# Altium PCB board.PcbDoc
Units mm, origin at the board's own origin, x right, y up, seen from the top; angles counter-clockwise.
Board outline 26.5 x 37 mm, 4 copper layers (Top Layer, Mid Layer 1, Mid Layer 2, Bottom Layer), stack 0.97 mm thick; 116 components, 67 nets, 313 pads, 64 vias.
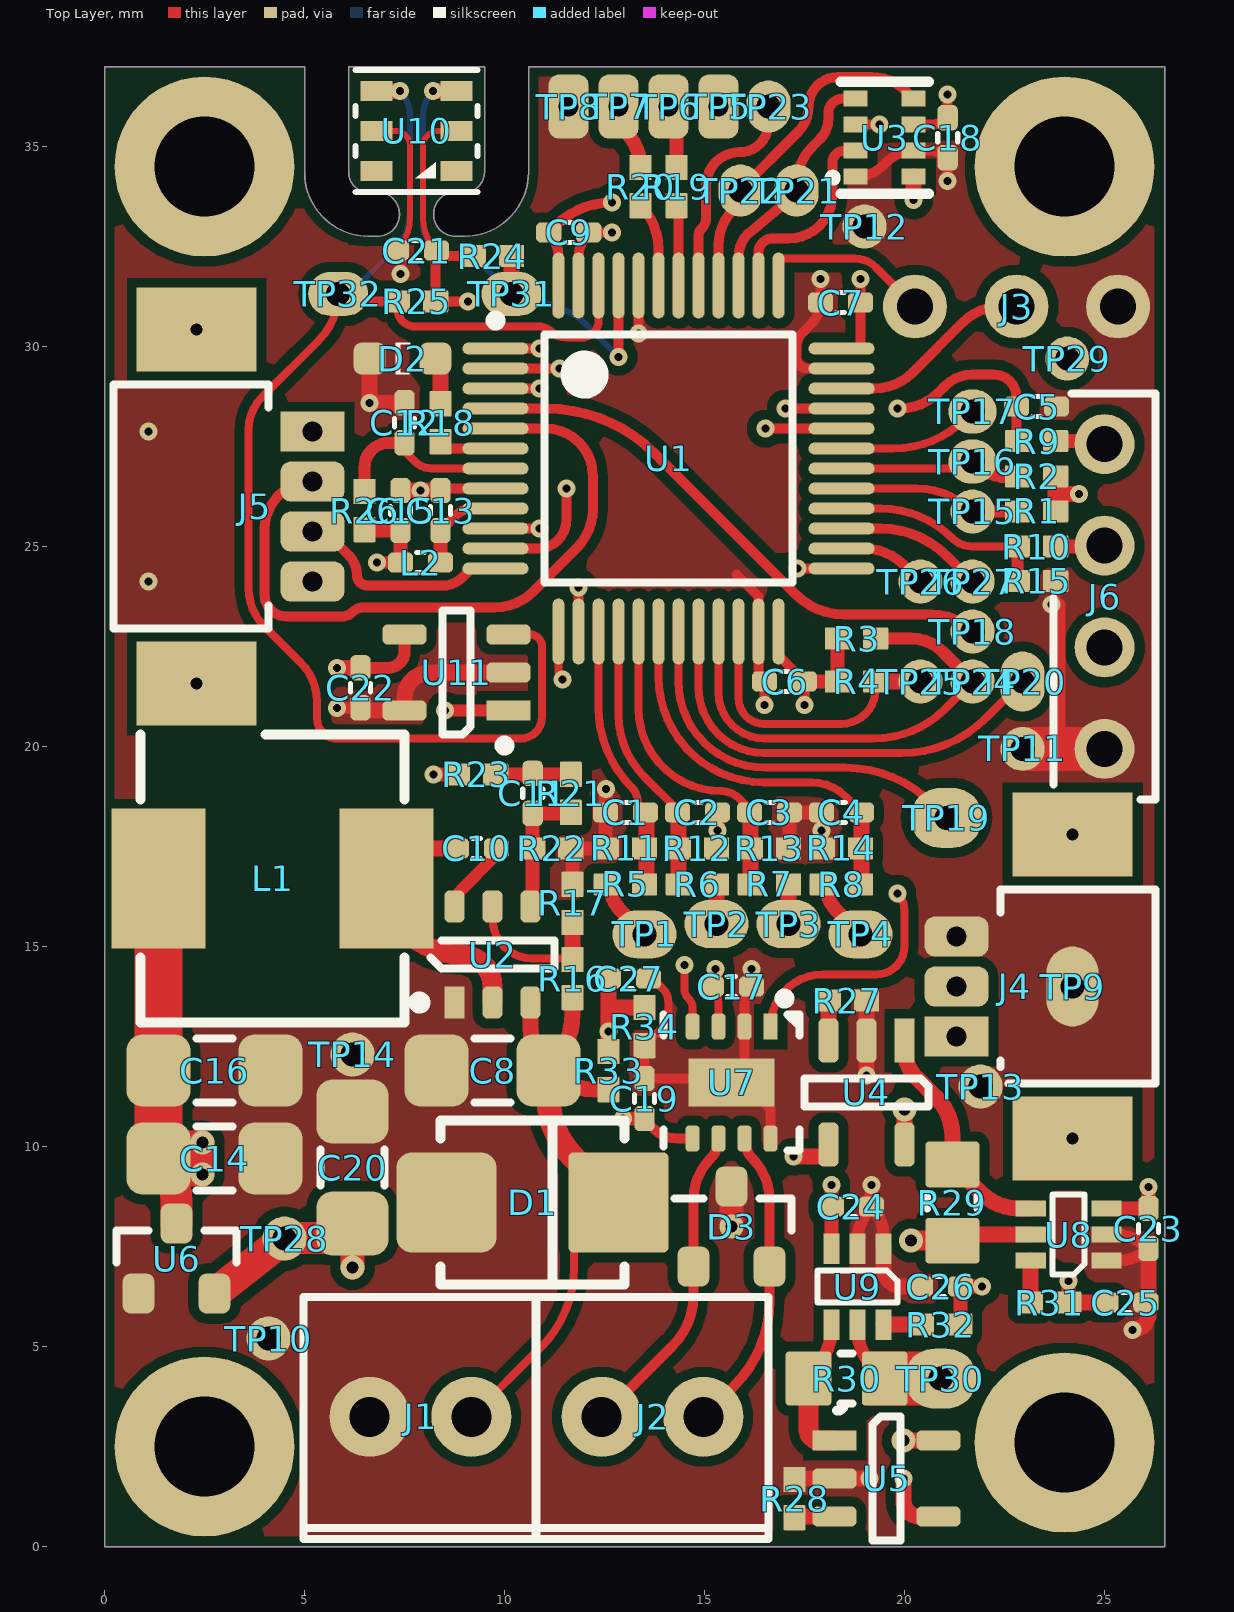
[diagram p0: Top Layer view]
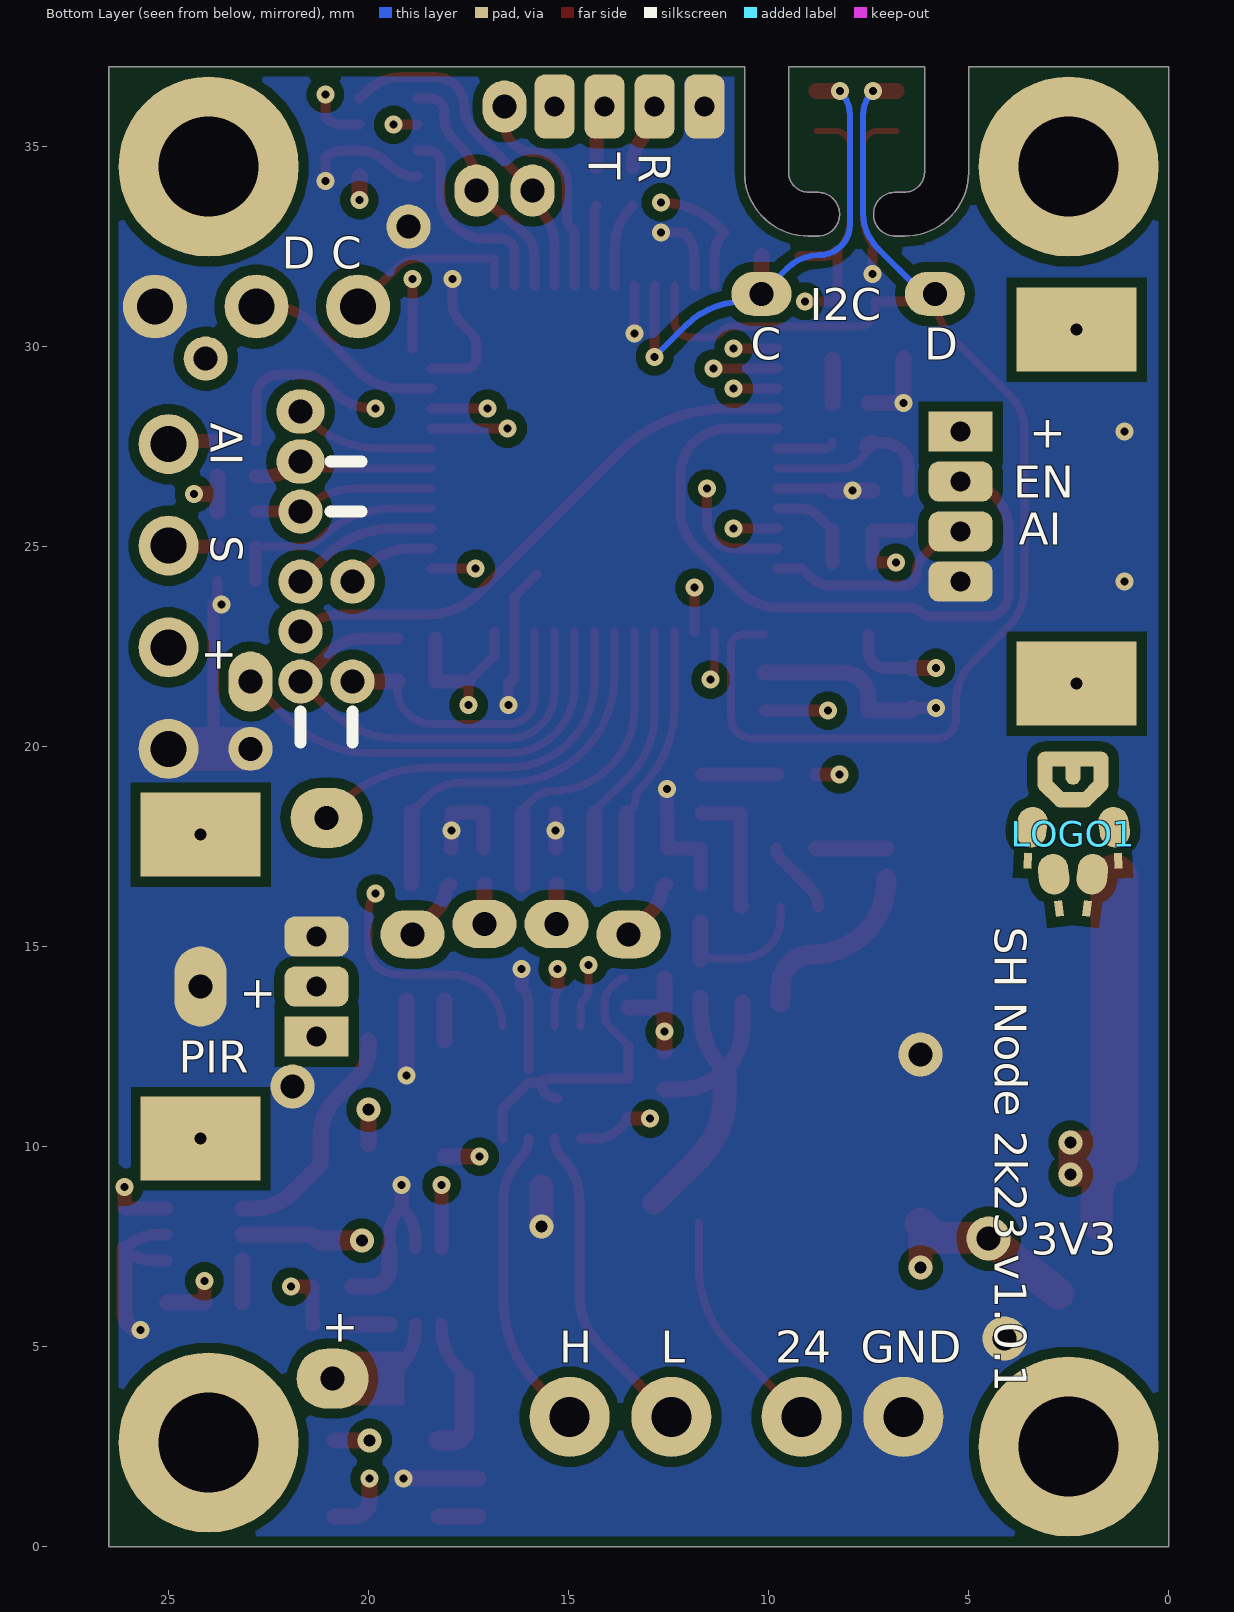
[diagram p1: Bottom Layer view, seen from below]
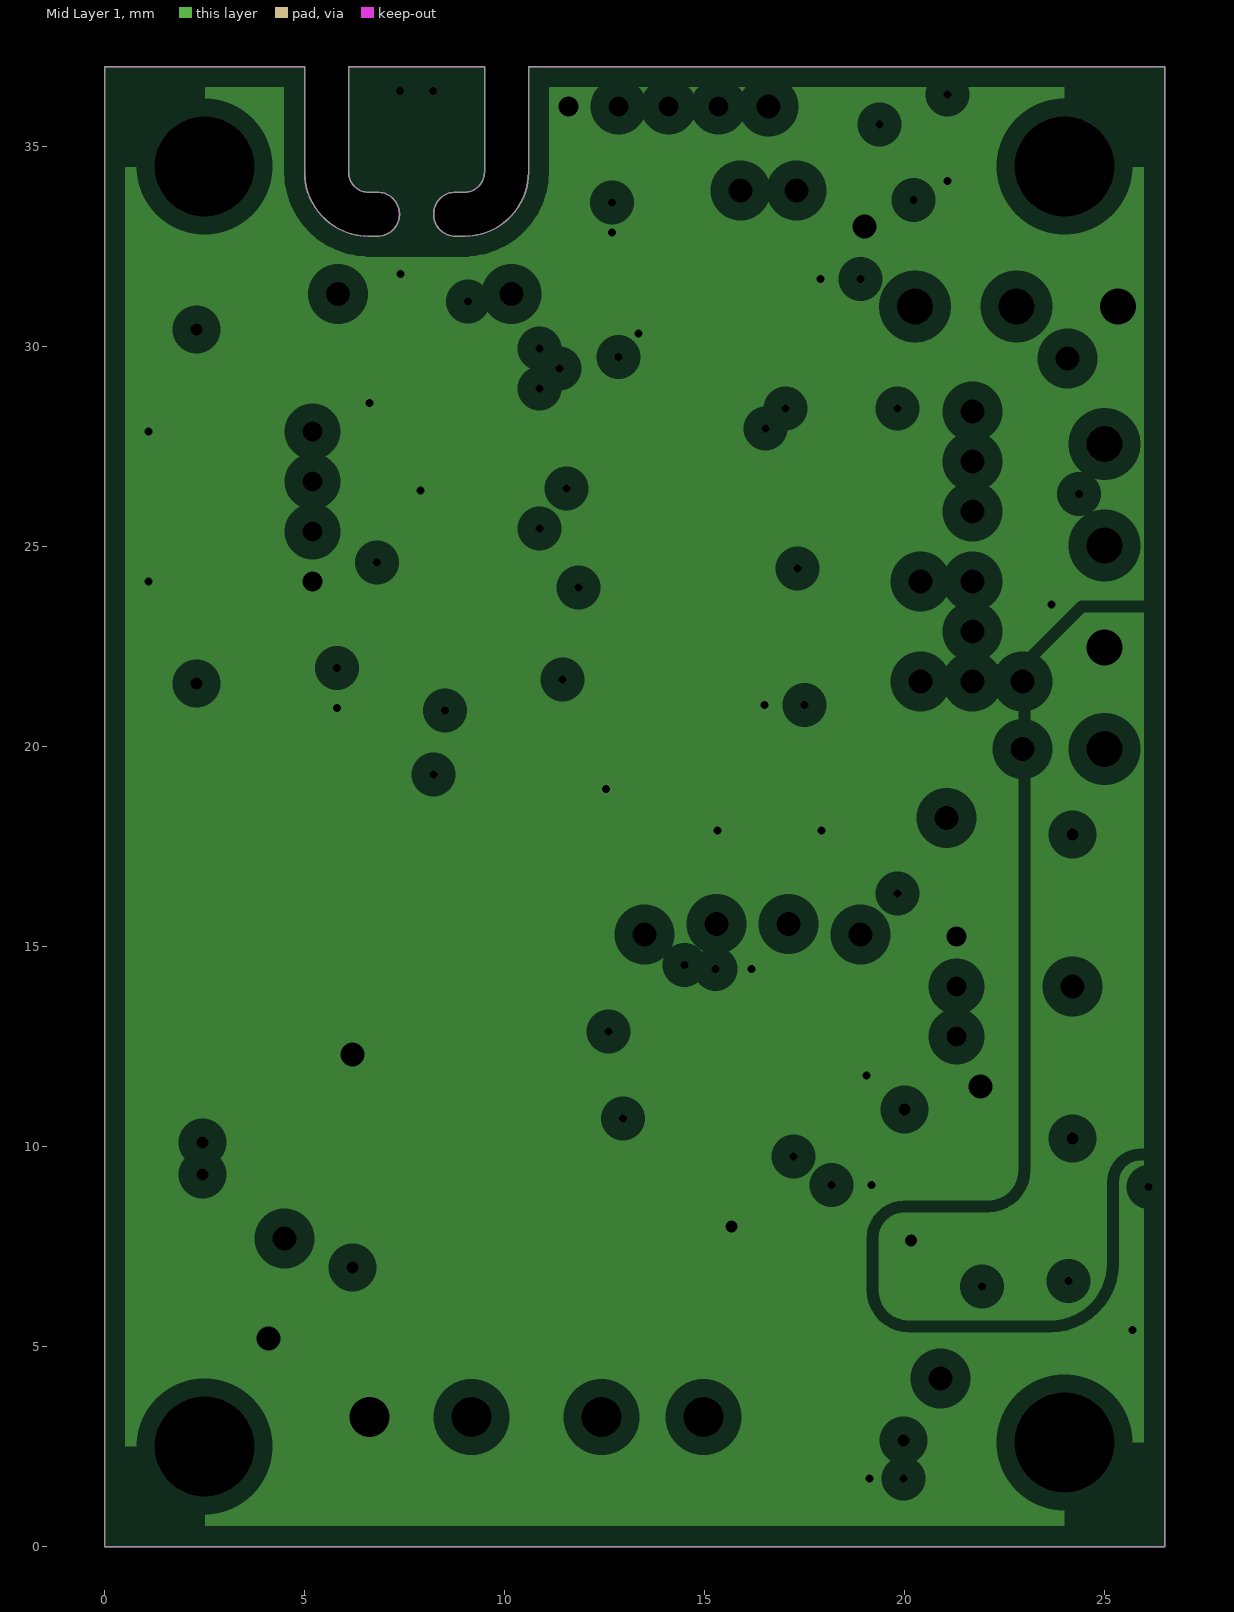
[diagram p2: Mid Layer 1, clearances drawn from the general rule]
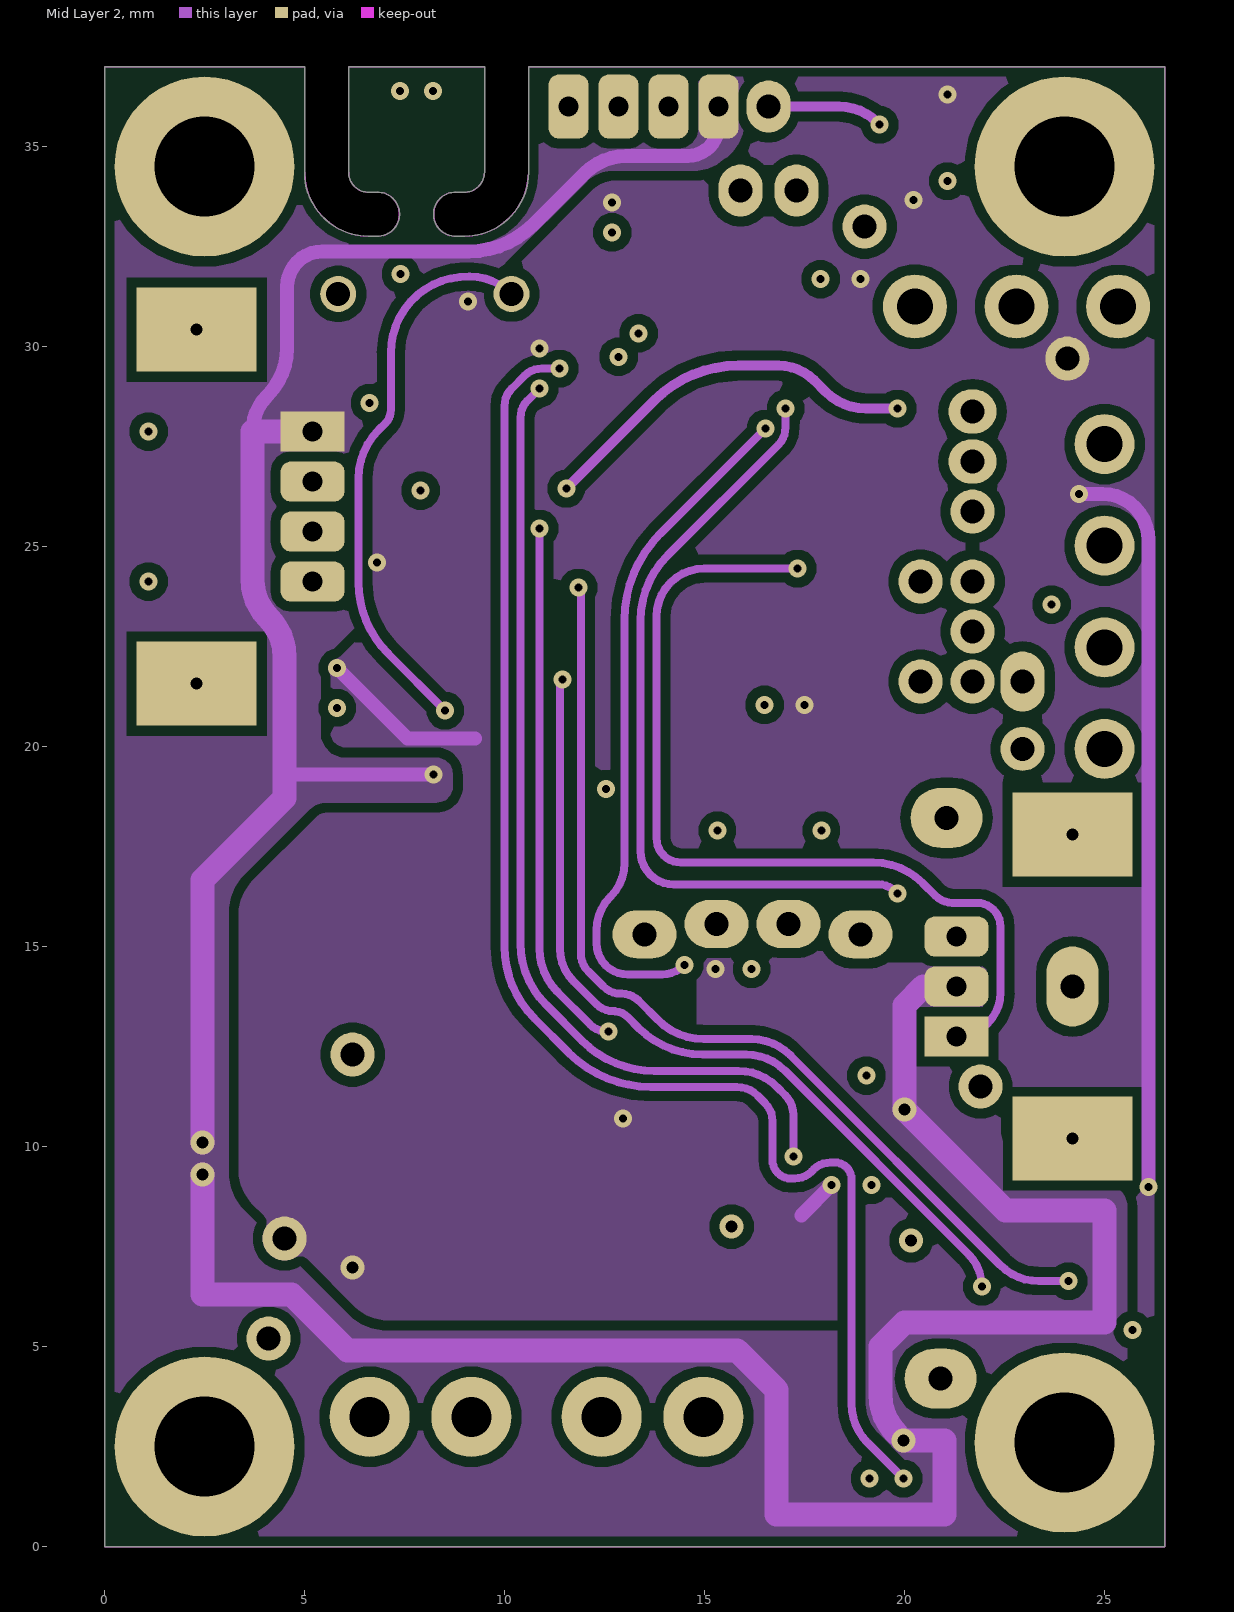
[diagram p3: Mid Layer 2]
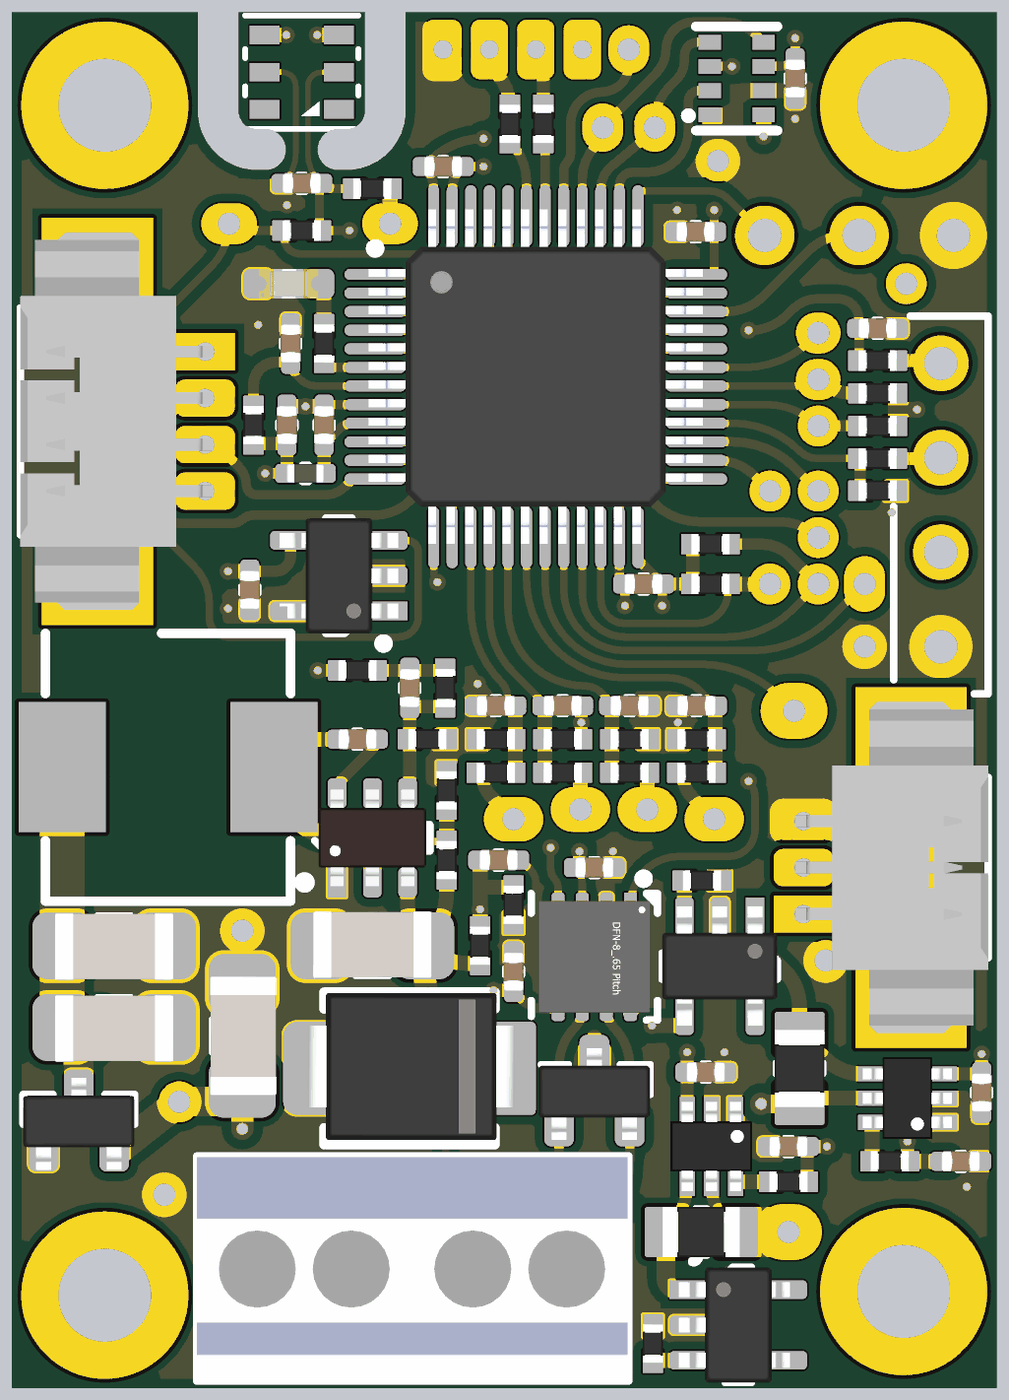
[diagram p4: 3D render of the assembled board from above, using the file's embedded part models]

## Layer stack, top to bottom
Top Solder: solder mask 0.0127, Solder Resist, Dk 3.8
Top Layer: signal copper 0.035
Dielectric 1: prepreg 0.1, 2313, Dk 4.05
Mid Layer 1: plane copper 0.0175, net (Multiple Nets)
Core: core 0.665, FR-4, Dk 4.5
Mid Layer 2: signal copper 0.0175
Dielectric 2: prepreg 0.1, 2313, Dk 4.05
Bottom Layer: signal copper 0.035
Bottom Solder: solder mask 0.0127, Solder Resist, Dk 3.8

## Board outline
5,34.358 ccw(c6.6,34.358) 6.6,32.758 6.825,32.758 ccw(c6.825,33.308) 6.825,33.858 6.6,33.858 cw(c6.6,34.358) 6.1,34.358 6.1,37 9.5,37 9.5,34.358 cw(c9,34.358) 9,33.858 8.775,33.858 ccw(c8.775,33.308) 8.775,32.758 9,32.758 ccw(c9,34.358) 10.6,34.358 10.6,37 26.5,37 26.5,0 0,0 0,37 5,37

## Design rules (kind name [scope] priority, off if disabled: settings)
AcuteAngle [All] p1: minimum=6.00000000000000E+0001 checktracksonly=FALSE
Clearance Clearance_1 [All] p1: gap=0.25 ignorepadtopadclearanceinfootprint=FALSE except(0.13: Arc-Arc Arc-Track Arc-SMDPad Arc-Via Track-Track Track-SMDPad Track-Via SMDPad-SMDPad SMDPad-Via THPad-Via Via-Via; 0.15: Arc-THPad Arc-Text Arc-Hole Track-THPad Track-Text Track-Hole SMDPad-THPad SMDPad-Text SMDPad-Hole THPad-THPad THPad-Text THPad-Hole Via-Text Via-Hole Fill-Text Fill-Hole Poly-Text Poly-Hole Region-Text Region-Hole Text-Text Text-Hole)
ComponentClearance ComponentClearance_1 [HasFootprint('CONN_DG308-2.54-2P') vs HasFootprint('CONN_DG308-2.54-2P')] p1: gap=-1 collisioncheckmode=3 verticalgap=2540 showdistances=FALSE
ComponentClearance ComponentClearance_3 [HasFootprint('HDR-1X4')] p2: gap=-1 collisioncheckmode=3 verticalgap=2540 showdistances=FALSE
ComponentClearance ComponentClearance_2 [HasFootprint('TP_TH_S0')] p3: gap=-1 collisioncheckmode=3 verticalgap=2540 showdistances=FALSE
ComponentClearance [All] p4: gap=0.3 collisioncheckmode=3 verticalgap=0.254 showdistances=FALSE
HoleSize [All] p1: absolutevalues=TRUE maxlimit=6 minlimit=0.2 maxpercent=80.000 minpercent=20.000
HoleToHoleClearance HoleToHoleClearance_1 [IsVia vs IsThruPin] p1: gap=0.7 allowstackedmicrovias=TRUE
HoleToHoleClearance [All] p2: gap=0.5 allowstackedmicrovias=TRUE
MinimumSolderMaskSliver [All] p1 off: minsoldermaskwidth=0.254
PlaneClearance [All] p1: clearance=0.45
PlaneConnect [All] p1: planeconnectstyle=Direct reliefexpansion=0.3 reliefentries=4 reliefconductorwidth=0.381 reliefairgap=0.178
PolygonConnect [All] p1: connectstyle=Direct reliefconductorwidth=0.381 reliefentries=4 polygonreliefangle="90 Angle" airgapwidth=0.356
RoutingVias [All] p1: holewidth=0.3 width=0.6 viastyle="Through Hole" minholewidth=0.2 minwidth=0.45 maxholewidth=0.9 maxwidth=1.27
SilkToSilkClearance [All] p1 off: silktosilkclearance=0.254
SilkToSolderMaskClearance [IsPad] p1 off: minsilkscreentomaskgap=0.254 clearancetoexposedcopper=TRUE
SolderMaskExpansion [All] p1: expansion=0.102 istentingtop=FALSE
UnRoutedNet [All] p1: checkbadconnections=TRUE
Width [All] p1: maxlimit=3.81 minlimit=0.14 preferedwidth=0.254
21 further rules are at their usual default settings.

## Components (designator, comment, footprint, x,y, rotation, side; value= is the part's Value field where it differs from the comment)
C1 "100nF" C0402 13.024,18.352 r0 top
C2 "100nF" C0402 14.824,18.352 r180 top
C3 "100nF" C0402 16.624,18.352 r180 top
C4 "100nF" C0402 18.424,18.352 r0 top
C5 "100nF" C0402 23.3,28.5 r180 top
C6 "100nF" C0402 17,21.625 r0 top
C7 "100nF" C0402 18.4,31.1 r0 top
C8 "10uF" C1206 9.7,11.9 r0 top
C9 "100nF" C0402 11.606,32.851 r180 top
C10 "100nF" C0402 9.3,17.452 r180 top
C11 "75pF" C0402 10.705,18.828 r90 top
C12 "100nF" C0402 7.5,28.093 r270 top
C13 "100nF" C0402 8.4,25.9 r270 top
C14 "10uF" C1206 2.75,9.7 r180 top
C15 "100nF" C0402 7.4,25.9 r270 top
C16 "10uF" C1206 2.75,11.9 r180 top
C17 "100nF" C0402 15.675,14 r180 top
C18 "100nF" C0402 21.08,35.219 r90 top
C19 "100nF" C0402 13.5,11.2 r270 top
C20 "10uF" C1206 6.2,9.475 r270 top
C21 "100nF" C0402 7.8,32.4 r0 top
C22 "100nF" C0402 6.4,21.467 r90 top
C23 "100nF" C0402 26.099,7.95 r90 top
C24 "100nF" C0402 18.675,8.499 r180 top
C25 "100nF" C0402 25.536,6.1 r180 top
C26 "100nF" C0402 20.9,6.5 r0 top
C27 "100nF" C0402 13.1,14.2 r180 top
D1 "24V" SMB 10.7,8.6 r0 top
D2 "GRN" LED-0603-GRN 7.45,29.7 r0 top
D3 "PESD2CAN" SOT-23#1 15.675,8 r270 top
J1 "24V" CONN_DG308-2.54-2P 7.9,3.244 r0 top
J2 "CAN" CONN_DG308-2.54-2P 13.7,3.244 r0 top
J3 "SWD" SWD 22.8,31 r90 top
J4 "PIR" CONN_MOLEX_532610371 24.2,14 r90 top
J5 "MQ2" CONN_MOLEX_532610471 2.3,26 r270 top
J6 "SRV/SMOKE" HDR-1X4 25,23.75 r0 top
L1 "10UH" IND-SMD_L7.2-W6.6_GPSR07X0 4.2,16.7 r180 top
L2 "BEAD" L0402 7.9,24.6 r0 top
LOGO1 "LOGO" LOGO 2.388,19.685 r0 bottom
R1 "10k" R0402 23.3,25.878 r0 top
R2 "10k" R0402 23.3,26.756 r0 top
R3 "10k" R0402 18.8,22.7 r180 top
R4 "10k" R0402 18.8,21.625 r180 top
R5 "105k" R0402 13.024,16.552 r0 top
R6 "105k" R0402 14.824,16.552 r180 top
R7 "105k" R0402 16.624,16.552 r180 top
R8 "105k" R0402 18.424,16.552 r0 top
R9 "3k" R0402 23.3,27.634 r0 top
R10 "1k" R0402 23.3,25 r0 top
R11 "13k7" R0402 13.024,17.452 r180 top
R12 "13k7" R0402 14.824,17.452 r0 top
R13 "13k7" R0402 16.624,17.452 r0 top
R14 "13k7" R0402 18.424,17.452 r180 top
R15 "2k" R0402 23.3,24.134 r0 top
R16 "105k" R0402 11.7,14.2 r90 top
R17 "13k7" R0402 11.7,16.076 r90 top
R18 "2k2" R0402 8.4,28.093 r270 top
R19 "100" R0402 14.3,34 r270 top
R20 "100" R0402 13.4,34 r270 top
R21 "105k" R0402 11.657,18.828 r270 top
R22 "13k7" R0402 11.181,17.452 r0 top
R23 "49.9R" R0402 9.3,19.304 r0 top
R24 "2k2" R0402 9.699,32.258 r180 top
R25 "2k2" R0402 7.8,31.131 r0 top
R26 "4k7" R0402 6.5,25.9 r90 top
R27 "3k" R0402 18.573,13.65 r0 top
R28 "3k" R0402 17.25,1.199 r90 top
R29 "20mR" R0805 21.198,8.6 r90 top
R30 "20mR" R0805 18.55,4.2 r180 top
R31 "3k" R0402 23.626,6.1 r180 top
R32 "3k" R0402 20.9,5.55 r180 top
R33 "105k" R0402 12.6,11.9 r90 top
R34 "13k7" R0402 13.5,13 r270 top
TP1 "" TP_TH_S0#1 13.311,15.302 r90 top
TP2 "" TP_TH_S0#2 15.3,15.552 r90 top
TP3 "" TP_TH_S0#2 17.1,15.552 r90 top
TP4 "" TP_TH_S0#3 19.4,15.302 r90 top
TP5 "" TP_TH_S0#4 15.2,36 r270 top
TP6 "" TP_TH_S0#5 14.1,36 r270 top
TP7 "" TP_TH_S0#5 12.85,36 r270 top
TP8 "" TP_TH_S0#6 11.8,36 r270 top
TP9 "" TP_TH_S0#7 24.2,14 r90 top
TP10 "" TP_TH_S0#8 4.1,5.2 r90 top
TP11 "" TP_TH_S0#8 22.95,19.94 r90 top
TP12 "" TP_TH_S0#9 19.049,33.133 r90 top
TP13 "" TP_TH_S0#8 21.9,11.5 r90 top
TP14 "" TP_TH_S0#8 6.2,12.3 r90 top
TP15 "" TP_TH_S0#10 21.7,25.924 r180 top
TP16 "" TP_TH_S0#11 21.7,27.2 r180 top
TP17 "" TP_TH_S0#12 21.7,28.5 r180 top
TP18 "" TP_TH_S0#13 21.7,23.1 r180 top
TP19 "" TP_TH_S0#14 21.05,18.04 r90 top
TP20 "" TP_TH_S0#15 23,21.625 r90 top
TP21 "" TP_TH_S0#16 17.3,33.9 r90 top
TP22 "" TP_TH_S0#16 15.9,33.9 r90 top
TP23 "" TP_TH_S0#16 16.6,36 r90 top
TP24 "" TP_TH_S0#8 21.7,21.625 r90 top
TP25 "" TP_TH_S0#8 20.4,21.625 r270 top
TP26 "" TP_TH_S0#17 20.4,24.2 r180 top
TP27 "" TP_TH_S0#8 21.7,24.125 r180 top
TP28 "" TP_TH_S0#8 4.5,7.7 r90 top
TP29 "" TP_TH_S0#8 24.07,29.7 r90 top
TP30 "" TP_TH_S0#18 20.9,4.2 r270 top
TP31 "" TP_TH_S0#19 10.176,31.415 r180 top
TP32 "" TP_TH_S0#19 5.842,31.415 r180 top
U1 "STM32F103CBT6" LQFP-48 14.1,27.2 r0 top
U2 "TPS54302" SOT-23-6 9.7,14.8 r270 top
U3 "BMP280" WLGA-8_L2.5-W2.0-P0.65-TR_DPS422 19.505,35.219 r180 top
U4 "DIO7002AST5" SOT-23-5 19.049,11.35 r90 top
U5 "DIO7002AST5" SOT-23-5 19.55,1.7 r180 top
U6 "XC6206P332MR" SOT-23#2 1.8,7.2 r270 top
U7 "SIT1042QTK/3" DFN8_3X3_P065 15.675,11.6 r270 top
U8 "INA199A1" SOT-363 24.1,7.8 r90 top
U9 "INA199A1" SOT-363 18.825,6.5 r180 top
U10 "AHT20-F" SENSOR-SMD_L3.0-W3.0-P1.00-BR 7.8,35.389 r0 top
U11 "ZD24C08A-STGMT" SOT-23-5 8.8,21.85 r0 top

## Footprints (in the part's own frame and the unit in brackets; to place one, negate y for a bottom-side part, rotate by r counter-clockwise, add the part's x,y. Pads: shape width x height; smd on the part's side, far side on the other; paste and mask are expansions set on the pad)
C0402 [mm] "Chip Capacitor Body"
  rrect50% 0.635x0.508 smd mask+0.05: 1(-0.5,0) 2(0.5,0)
  silkscreen extent -0.1,-0.25 0.1,0.25, body extent -0.52,-0.27 0.53,0.28, height 0.55
C1206 [mm] "Chip Capacitor"
  rrect50% 1.6x1.8 smd: 1(-1.4,0) 2(1.4,0)
  silkscreen extent -0.45,-0.8 0.45,0.8, body extent -1.6,-0.88 1.6,0.92, height 1.6
CONN_DG308-2.54-2P [mm]
  round 2 hole 1 mask+0: 1(1.27,0) 2(-1.27,0)
  silkscreen extent -2.92,-3.05 2.9,3, body extent -2.92,-3.05 2.88,2.97, height 7.83
CONN_MOLEX_532610371 [mm] "R/A"
  rect 1x1.6 hole 0.5: 1(-1.25,2.9)
  rrect50% 1x1.6 hole 0.5: 2(0,2.9) 3(1.25,2.9)
  rect 2.1x3 hole 0.3: 4(-3.8,0) 4(3.8,0)
  silkscreen extent -2.43,-2.08 2.42,1.8, body extent -4.45,-2.08 4.45,3.12, height 3.4
CONN_MOLEX_532610471 [mm] "R/A"
  rect 1x1.6 hole 0.5: 1(-1.875,2.9)
  rrect50% 1x1.6 hole 0.5: 2(-0.625,2.9) 3(0.625,2.9) 4(1.875,2.9)
  rect 2.1x3 hole 0.3: 5(-4.425,0) 5(4.425,0)
  silkscreen extent -3.05,-2.08 3.05,1.8, body extent -5.08,-2.08 5.07,3.13, height 3.4
DFN8_3X3_P065 [mm]
  rect 0.65x0.35 smd mask+0.05: 1(-1.4,0.975)
  rrect50% 0.65x0.35 smd mask+0.05: 2(-1.4,0.325) 3(-1.4,-0.325) 4(-1.4,-0.975) 5(1.4,-0.975) 6(1.4,-0.325) 7(1.4,0.325) 8(1.4,0.975)
  rect 1.2x2.15 smd mask+0.05: 9(0,0)
  silkscreen extent -2.22,-1.7 1.7,1.7, body extent -1.51,-1.5 1.51,1.5, height 0.8
HDR-1X4 [mm]
  round 1.5 hole 0.9: 1(0,3.81) 2(0,1.27) 3(0,-1.27) 4(0,-3.81)
  silkscreen extent -1.27,-5.08 1.27,5.08
IND-SMD_L7.2-W6.6_GPSR07X0 [mm]
  rect 2.35x3.5 smd: 1(-2.85,0) 2(2.85,0)
  silkscreen extent -3.3,-3.6 3.3,3.6, body extent -3.3,-3.6 3.3,3.6, height 3
L0402 [mm] "Chip Inductor"
  rrect50% 0.635x0.508 smd mask+0.05: 1(-0.5,0) 2(0.5,0)
  silkscreen extent -0.1,-0.25 0.1,0.25, body extent -0.5,-0.25 0.5,0.25, height 0.5
LED-0603-GRN [mm]
  rrect50% 0.8x0.8 smd mask+0.05: 1(0.825,0) 2(-0.825,0)
  silkscreen extent -0.18,-0.4 0.2,0.4, body extent -0.8,-0.4 0.8,0.4, height 0.6
LOGO [mil]
  rect 15.75x7.87 smd rot 93 mask+4: ""(-44.55,100)
  oval 30x40 smd rot 8 mask+4: ""(-40.55,67)
  oval 15x39.5 smd mask+4: ""(-27.5,12.5) ""(27.5,12.5)
  oval 15x36.21 smd rot 135 mask+4: ""(-20,32.5)
  oval 30x40 smd rot 173 mask+4: ""(-18.99,113.27)
  rect 15.75x7.87 smd rot 83 mask+4: ""(-13.91,147.15)
  oval 70x15 smd mask+4: ""(0,0)
  oval 15x32.5 smd mask+4: ""(0,9)
  oval 39.5x15 smd mask+4: ""(0,40)
  rect 15.75x7.87 smd rot 97 mask+4: ""(13.91,147.15)
  oval 30x40 smd rot 7 mask+4: ""(18.99,113.27)
  oval 15x36.21 smd rot 45 mask+4: ""(20,32.5)
  oval 30x40 smd rot 172 mask+4: ""(40.55,67)
  rect 15.75x7.87 smd rot 87 mask+4: ""(44.55,100)
LQFP-48 [mm]
  oval 1.65x0.3 smd mask+0.05: 1(-4.325,2.75) 2(-4.325,2.25) 3(-4.325,1.75) 4(-4.325,1.25) 5(-4.325,0.75) 6(-4.325,0.25) 7(-4.325,-0.25) 8(-4.325,-0.75) 9(-4.325,-1.25) 10(-4.325,-1.75) 11(-4.325,-2.25) 12(-4.325,-2.75) 25(4.325,-2.75) 26(4.325,-2.25) 27(4.325,-1.75) 28(4.325,-1.25) 29(4.325,-0.75) 30(4.325,-0.25) 31(4.325,0.25) 32(4.325,0.75) 33(4.325,1.25) 34(4.325,1.75) 35(4.325,2.25) 36(4.325,2.75)
  oval 0.3x1.65 smd mask+0.05: 13(-2.75,-4.325) 14(-2.25,-4.325) 15(-1.75,-4.325) 16(-1.25,-4.325) 17(-0.75,-4.325) 18(-0.25,-4.325) 19(0.25,-4.325) 20(0.75,-4.325) 21(1.25,-4.325) 22(1.75,-4.325) 23(2.25,-4.325) 24(2.75,-4.325) 37(2.75,4.325) 38(2.25,4.325) 39(1.75,4.325) 40(1.25,4.325) 41(0.75,4.325) 42(0.25,4.325) 43(-0.25,4.325) 44(-0.75,4.325) 45(-1.25,4.325) 46(-1.75,4.325) 47(-2.25,4.325) 48(-2.75,4.325)
  silkscreen extent -4.45,-3.1 3.1,3.57, body extent -4.5,-4.5 4.5,4.5, height 1.5
R0402 [mm]
  rrect10% 0.635x0.55 smd mask+0.05: 1(-0.476,0) 2(0.476,0)
  body extent -0.52,-0.27 0.53,0.28, height 0.4
R0805 [mil] "Chip Resistor; Body 1.6 x 0.8 mm (LxW typ)"
  rrect15% 45x53.15 smd: 1(-37.5,0) 2(37.5,0)
  silkscreen extent -6,-25 6,25, body extent -41,-27 41,27, height 24
SENSOR-SMD_L3.0-W3.0-P1.00-BR [mm]
  rect 0.8x0.5 smd mask+0.05: 1(1,-1) 2(1,0) 3(1,1) 4(-1,1) 5(-1,0) 6(-1,-1)
  silkscreen extent -1.52,-1.52 1.52,1.52, body extent -1.5,-1.5 1.5,1.5, height 0.8
SMB [mm]
  rrect30% 2.5x2.5 smd mask+0.05: 1(-2.15,0)
  rrect10% 2.5x2.5 smd mask+0.05: 2(2.15,0)
  silkscreen extent -2.3,-2.05 2.3,2.05, body extent -2.75,-1.93 2.85,2.03, height 2.65
SOT-23#1 [mm]
  rrect50% 1x0.8 smd mask+0.05: 1(1,-0.95) 2(1,0.95) 3(-1,0)
  silkscreen extent -0.7,-1.42 0.1,1.5, body extent -1.27,-1.5 1.33,1.5, height 1.1
SOT-23#2 [mm]
  rrect50% 1x0.8 smd mask+0.05: 1(0.875,-0.95) 2(0.875,0.95) 3(-0.875,0)
  silkscreen extent -0.7,-1.5 0.1,1.5, body extent -1.27,-1.5 1.33,1.5, height 1.1
SOT-23-5 [mm]
  rect 1.1x0.5 smd mask+0.05: 1(1.3,-0.95)
  rrect50% 1.1x0.5 smd mask+0.05: 2(1.3,0) 3(1.3,0.95) 4(-1.3,0.95) 5(-1.3,-0.95)
  silkscreen extent -0.35,-1.55 0.35,1.55, body extent -1.6,-1.55 1.6,1.55, height 1.45
SOT-23-6 [mm]
  rect 0.8x0.5 smd mask+0.05: 1(1.2,-0.95)
  rrect50% 0.8x0.5 smd mask+0.05: 2(1.2,0) 3(1.2,0.95) 4(-1.2,0.95) 5(-1.2,0) 6(-1.2,-0.95)
  silkscreen extent -0.35,-1.95 1.32,1.55, body extent -1.3,-1.45 1.3,1.45, height 1.14
SOT-363 [mil]
  rect 16x30 smd mask+1.97: 1(-25.59,-37.4) 2(0,-37.4) 3(25.59,-37.4) 4(25.59,37.4) 5(0,37.4) 6(-25.59,37.4)
  silkscreen extent -39,-16 39,16, body extent -43,-47 43,47, height 43
SWD [mm]
  round 1.6 hole 0.9: 1(0,2.54) 2(0,0) 3(0,-2.54)
TP_TH_S0#1 [mm] "TP30_SMD"
  oval 1.2x1.6 hole 0.6 mask+0.05: 1(0,-0.189)
TP_TH_S0#2 [mm] "TP30_SMD"
  oval 1.2x1.6 hole 0.6 mask+0.05: 1(0.01,0)
TP_TH_S0#3 [mm] "TP30_SMD"
  oval 1.2x1.6 hole 0.6 mask+0.05: 1(0,0.5)
TP_TH_S0#4 [mm] "TP30_SMD"
  rrect50% 1.6x1 hole 0.5 mask+0.05: 1(0,0.15)
TP_TH_S0#5 [mm] "TP30_SMD"
  rrect50% 1.6x1 hole 0.5 mask+0.05: 1(0,0)
TP_TH_S0#6 [mm] "TP30_SMD"
  rrect50% 1.6x1 hole 0.5 mask+0.05: 1(0,-0.2)
TP_TH_S0#7 [mm] "TP30_SMD"
  oval 2x1.3 hole 0.6 mask+0.05: 1(0,0)
TP_TH_S0#8 [mm] "TP30_SMD"
  round 1.1 hole 0.6 mask+0.05: 1(0,0)
TP_TH_S0#9 [mm] "TP30_SMD"
  round 1.1 hole 0.6 mask+0.05: 1(-0.133,0.049)
TP_TH_S0#10 [mm] "TP30_SMD"
  round 1.1 hole 0.6 mask+0.05: 1(0,0.049)
TP_TH_S0#11 [mm] "TP30_SMD"
  oval 1.2x1.1 hole 0.6 mask+0.05: 1(0,0.075)
TP_TH_S0#12 [mm] "TP30_SMD"
  oval 1.2x1.1 hole 0.6 mask+0.05: 1(0,0.125)
TP_TH_S0#13 [mm] "TP30_SMD"
  round 1.1 hole 0.6 mask+0.05: 1(0,0.225)
TP_TH_S0#14 [mm] "TP30_SMD"
  oval 1.5x1.8 hole 0.6 mask+0.05: 1(0.175,0)
TP_TH_S0#15 [mm] "TP30_SMD"
  oval 1.5x1.1 hole 0.6 mask+0.05: 1(0,0.05)
TP_TH_S0#16 [mm] "TP30_SMD"
  oval 1.3x1.1 hole 0.6 mask+0.05: 1(0,0)
TP_TH_S0#17 [mm] "TP30_SMD"
  round 1.1 hole 0.6 mask+0.05: 1(0,0.075)
TP_TH_S0#18 [mm] "TP30_SMD"
  oval 1.5x1.8 hole 0.6 mask+0.05: 1(0,0)
TP_TH_S0#19 [mm] "TP30_SMD"
  oval 1.5x1.1 / inner round 0.9 / far side oval 1.5x1.1 hole 0.6 mask+0.05: 1(0,0.1)
WLGA-8_L2.5-W2.0-P0.65-TR_DPS422 [mm]
  rect 0.6x0.4 smd mask+0.05: 1(0.725,0.975) 2(0.725,0.325) 3(0.725,-0.325) 4(0.725,-0.975) 5(-0.725,-0.975) 6(-0.725,-0.325) 7(-0.725,0.325) 8(-0.725,0.975)
  silkscreen extent -1.1,-1.4 1.4,1.4, body extent -1,-1.25 1,1.25, height 1

## Part data
C1 C2 C3 C4 C5 C6 C7 C9 C10 C12 C13 C15 C17 C18 C19 C21 C22 C23 C24 C25 C26 C27: library part CAP, "100nF 50V 0402", LCSC part number=C110251, P/N=0402B104K500NT
C8 C14 C16 C20: library part CAP, "10uf 50V 1206", LCSC part number=C89632, P/N=CL31B106KBHNNNE
C11: library part CAP, "75pF 50V 0402", LCSC part number=C107010, P/N=CC0402JRNPO9BN750
D1: library part SMCJ54A, "P6SMB24A", LCSC part number=C5155417, P/N=P6SMB24A
D2: library part LED-0603-GREEN, "LED 0603 GRN", LCSC part number=C434423, P/N=SZYY0603YG
D3: library part CDSOT23-SM712, LCSC part number=C5261081, P/N=PESD2CAN
J1 J2: library part "CONN MOLEX HDR-M 1x4", "DG308-2.54-02P-14-00A(H)", LCSC part number=C699496, P/N=DG308-2.54-02P-14-00A(H)
J3 J4 J5 J6: library part "Header 3"
L1: library part SRN3015-100M, "CYA0630-10UH", LCSC part number=C5189958, P/N=CYA0630-10UH
L2: library part BLM18AG601SN1D, "BEAD 0402", LCSC part number=C76883, P/N=BLM15AG102SN1D
R1 R2 R3 R4: library part RES, "10k 0402", LCSC part number=C25744, P/N=0402WGF1002TCE
R5 R6 R7 R8 R16 R21 R33: library part RES, "105k 0402", LCSC part number=C170210, P/N=WR04X1053FTL
R9 R27 R28: library part R0201, "3k 0402", LCSC part number=C25784, P/N=0402WGF3001TCE
R10: library part RES, "1k 0402", LCSC part number=C11702, P/N=0402WGF1001TCE
R11 R12 R13 R14 R17 R22 R34: library part RES, "13k7 0402", LCSC part number=C2933072, P/N=FRC0402F1372TS
R15 R18 R24 R25: library part RES, "2k 0402", LCSC part number=C4109, P/N=0402WGF2001TCE
R19 R20: library part RES, "100 0402", LCSC part number=C25076, P/N=0402WGF1000TCE
R23: library part R0201, "49R9 0402", LCSC part number=C87044, P/N=RC0402FR-0749R9L
R26: library part RES, "4k7 0402", LCSC part number=C25900, P/N=0402WGF4701TCE
R29 R30: library part R0201, "0805W4F200MT5E", LCSC part number=C7467520, P/N=FRL0805JR020TS
R31 R32: library part RES, "3k 0402", LCSC part number=C25784, P/N=0402WGF3001TCE
TP1 TP2 TP3 TP4 TP5 TP6 TP7 TP8 TP9 TP10 TP11 TP12 TP13 TP14 TP15 TP16 TP17 TP18 TP19 TP20 TP21 TP22 TP23 TP24 TP25 TP26 TP27 TP28 TP29 TP30 TP31 TP32: library part TP_Dup1
U1: LCSC part number=C8304, P/N=STM32F103CBT6
U2: library part LM27313XMFX, "TPS54302DDCR", LCSC part number=C311983, P/N=TPS54302
U3: LCSC part number=C83291, P/N=BMP280
U4 U5: LCSC part number=C403840, P/N=DIO7002AST5
U6: library part Component_4_1, LCSC part number=C5148692, P/N=XC6206P332MR
U7: library part LTC2875, "IC INTERFACE CAN", LCSC part number=C5308062, P/N=SIT1042QTK/3
U8 U9: library part MCP65R41T-2402, LCSC part number=C59135, P/N=INA199A1DCKR
U10: library part AHT21, LCSC part number=C3012622, P/N=AHT20-F
U11: LCSC part number=C2896640, P/N=ZD24C08A-STGMT

## Free pads (board coordinates)
  round 4.5 hole 2.5: M(2.5,34.5) M(2.5,2.5) M(24,2.6) M(24,34.5)

## Via types
v1: diameter 0.45, hole 0.2, Top Layer to Bottom Layer, tented both sides, 57 vias
v2: diameter 0.6, hole 0.3, Top Layer to Bottom Layer, tented both sides, 7 vias

## Nets (pads, with @x,y where several pads share a name; then routed paths per layer and width w, separated by ;. In a path a pad name is that pad's centre, name@x,y a point inside that pad or via, vN(x,y) a via of type N, cw(c..) or ccw(c..) an arc to the next point about the centre after c; other vN are vias at no path point)
3V3: C6.2 C7.2 C9.2 C15.2 C18.2 C19.2 C20.2 C21.2 C22.2 C23.2 C24.2 L2.1 R1.2 R2.2 R3.2 R4.2 R24.2 R25.2 R26.1 TP28.1 TP29.1 U1.1 U1.24 U1.36 U1.48 U3.6 U3.8 U6.2 U7.5 U8.3 U9.3 U10.2 U11.4 | length 59.7
  Top Layer w0.15: C21.2 cw(c9.119,33.219) 7.961,33.219 7.961,35.015 cw(c8.335,35.015) 8.335,35.389 U10.2
  Top Layer w0.25: v1(9.087,31.131) R25.2 8.276,32.376 cw(c8.3,32.376) C21.2 ccw(c8.643,32.743) 8.4,32.323 ccw(c8.643,32.743) 8.643,32.258 R24.2 ; U1.1 v1(10.875,29.95) ; U1.48@11.35,32.125 U1.48 11.35,32.263 ccw(c10.518,32.263) C9.2 11.271,33.016 cw(c12.691,31.597) v1(12.691,33.604) ; C19.2 13.5,10.673 13.736,10.436 ccw(c14.307,11.007) 14.307,10.2 U7.5 ; U1.24 16.85,22.275 C6.2 v1(17.5,21.04) ; U1.36@18.9,29.95 C7.2 v1(18.9,31.685) ; U3.6 20.658,35.544 ccw(c20.658,36.142) C18.2 v1(21.08,36.304)
  Top Layer w0.3: C22.2 7.089,21.967 ccw(c7.089,22.379) 7.5,22.379 U11.4 ; v1(6.815,24.6) L2.1
  Top Layer w0.35: R26.1 ccw(c6.558,25.482) 6.558,25.4 C15.2 ; L2.1 C15.2 ; v1(12.965,10.7) C19.2 ; C6.2 R4.2 R3.2 ; U9.3 C24.2 v1(18.175,9.034) ; U8.3 C23.2 v1(26.099,8.985)
  Top Layer w0.4: v1(5.815,21.967) C22.2 ; v1(20.23,33.66) U3.8 ; R1.2 23.776,26.317 ; R2.2 23.776,26.317 ; v1(24.361,26.317) 23.776,26.317
  Top Layer w0.6: v2(6.2,6.975) C20.2
  Top Layer w0.8: U6.2 TP28.1 ; TP28.1@4.5,7.711 5.836,7.711 C20.2
  Mid Layer 2 w0.35: v1(5.815,21.967) 7.579,20.204 9.261,20.204 ; 17.419,8.279 v1(18.175,9.034) ; v1(24.361,26.317) 24.943,26.317 cw(c24.943,25.161) 26.099,25.161 v1(26.099,8.985)
5V: C14.2 C16.2 C17.2 J4.2 J5.1 L1.2 R23.1 TP5.1 U4.5 U5.5 U6.3 U7.3 | length 106.3
  Top Layer w0.2: C17.2 cw(c14.753,13.578) 15.35,13.578 U7.3
  Top Layer w0.35: v1(8.231,19.301) R23.1@8.815,19.301 ; C17.2@15.275,14 v1(15.275,14.435)
  Top Layer w0.4: v2(19.975,2.65) U5.5 ; U4.5 v2(19.999,10.925)
  Top Layer w0.6: C14.2 1.75,9.3 v2(2.45,9.3) v2(2.45,10.1) C14.2@1.35,10.1
  Top Layer w0.8: C14.2 cw(c0.264,8.614) 1.8,8.614 U6.3
  Top Layer w1.2: C14.2 1.35,10.1 C16.2 L1.2
  Mid Layer 2 w0.35: 3.7,27.875 cw(c4.967,27.875) 4.071,28.771 ; 4.072,28.772 ccw(c2.883,29.959) 4.563,29.959 4.563,31.491 cw(c5.451,31.491) 5.451,32.378 9.105,32.378 ccw(c9.105,34.663) 10.721,33.048 12.002,34.328 cw(c13.045,33.284) 13.045,34.76 14.572,34.76 ccw(c14.572,35.538) 15.35,35.538 TP5.1 ; 4.5,19.301 v1(8.231,19.301)
  Mid Layer 2 w0.6: v2(2.45,9.3) 2.45,6.3 4.673,6.3 6.073,4.9 15.818,4.9 16.8,3.918 16.8,0.8 21,0.8 21,2.65 v2(19.975,2.65) ; v2(2.45,10.1) 2.45,16.666 4.5,18.716 4.5,19.301 4.5,22.245 ccw(c3.128,22.245) 4.098,23.215 cw(c5.06,24.177) 3.7,24.177 3.7,27.875 J5.1 ; v2@19.801,2.824 cw(c20.771,3.793) 19.4,3.793 19.4,4.9 19.4,5 20,5.6 25,5.6 25,8.4 22.524,8.4 v2(19.999,10.925) 19.999,13.53 20.469,14 J4.2
24V: C8.2 D1.2 J1.1 R16.1 R33.1 U2.3 | length 15.2
  Top Layer w0.2: J1.1 10.924,4.997 ccw(c8.964,6.957) 11.736,6.957 D1.2@11.736,8.105
  Top Layer w0.4: U2.3 10.65,12.987 ccw(c12.187,12.987) C8.2 ; R16.1 11.7,13.348 cw(c9.652,13.348) C8.2 ; R33.1 12.249,11.424 cw(c12.249,13.049) C8.2
  Top Layer w0.6: C8.2 11.1,11.227 ccw(c13.217,11.227) 11.72,9.73 D1.2
AI0: C1.2 R5.2 R11.1 U1.15 | length 6.4
  Top Layer w0.2: U1.15 12.35,20.982 ccw(c15.185,20.982) 13.18,18.978 cw(c12.817,18.615) 13.331,18.615 ccw(c13.498,18.615) C1.2@13.38,18.496
  Top Layer w0.4: R5.2@13.548,16.552 C1.2@13.548,18.328
AI1: C2.2 R6.2 R12.1 U1.16 | length 6.8
  Top Layer w0.2: U1.16 12.85,20.796 ccw(c15.034,20.796) 13.49,19.252 14.348,18.394 C2.2@14.348,18.328
  Top Layer w0.4: R6.2 R12.1 C2.2@14.348,18.328
AI2: C3.2 R7.2 R13.1 U1.17 | length 7.9
  Top Layer w0.2: U1.17 13.35,20.956 ccw(c15.421,20.956) 15.421,18.885 cw(c15.421,18.253) 15.868,18.7 16.059,18.508 cw(c15.903,18.352) C3.2
  Top Layer w0.4: R7.2 R13.1 C3.2@16.148,18.328
AI3: C4.2 R8.2 R14.1 U1.18 | length 9.7
  Top Layer w0.2: U1.18 13.85,21.746 ccw(c16.491,21.746) 16.491,19.105 17.67,19.105 cw(c17.67,17.894) 18.526,18.75 C4.2
  Top Layer w0.4: R8.2@18.924,16.576 18.924,17.452 C4.2
CAN_H: D3.2 J2.1 U7.7 | length 7.7
  Top Layer w0.25: J2.1 15.747,4.021 ccw(c13.628,6.14) 16.625,6.14 D3.2 16.625,8.674 ccw(c15.174,8.674) 16.2,9.7 cw(c16.683,10.183) 16,10.183 U7.7
CAN_L: D3.1 J2.2 U7.6 | length 8
  Top Layer w0.25: J2.2 14.204,5.018 ccw(c12.948,6.275) 14.725,6.275 D3.1 14.725,8.674 cw(c16.176,8.674) 15.15,9.7 ccw(c14.667,10.183) 15.35,10.183 U7.6
CAN_RX: U1.32 U7.4 | length 20.6
  Top Layer w0.2: v1(14.5,14.535) 14.5,13.941 ccw(c14.841,13.941) 14.6,13.7 14.602,13.698 cw(c14.367,13.462) 14.7,13.462 U7.4
  Top Layer w0.25: v1(16.525,27.95) U1.32
  Mid Layer 2 w0.2: v1(14.5,14.535) cw(c13.933,15.102) 13.933,14.3 13.082,14.3 cw(c13.082,15.082) 12.3,15.082 12.3,15.4 cw(c13.495,15.4) 12.65,16.245 ccw(c11.805,17.09) 13,17.09 13,23.167 cw(c16.036,23.167) 13.889,25.314 v1(16.525,27.95)
CAN_TX: U1.33 U7.1 | length 26.7
  Top Layer w0.2: U7.1 cw(c17.95,13) 17.95,14.3 19.293,14.3 ccw(c19.293,15.007) 20,15.007 20,15.899 ccw(c19.398,15.899) v1(19.824,16.325)
  Top Layer w0.25: v1(17.025,28.45) U1.33
  Mid Layer 2 w0.2: v1(17.025,28.45) 17.025,27.978 cw(c16.415,27.978) 16.847,27.547 14.073,24.773 ccw(c15.697,23.149) 13.4,23.149 13.4,17.383 ccw(c14.231,17.383) 14.231,16.552 19.344,16.552 cw(c19.344,15.942) 19.775,16.373 v1(19.824,16.325)
CS1: TP19.1 U1.19 | length 9.6
  Top Layer w0.2: U1.19 14.35,21.628 ccw(c16.509,21.628) 16.509,19.47 18.526,19.47 cw(c18.526,16.406) 20.692,18.572 TP19.1
CS_BARO: U1.38 U3.2 | length 5.1
  Top Layer w0.25: U1.38 16.35,32.35 cw(c16.7,32.35) 16.7,32.7 17.1,32.7 ccw(c17.1,33.8) 18.2,33.8 18.2,34.604 cw(c18.49,34.604) 18.49,34.894 U3.2
D0: TP20.1 U1.20 | length 11
  Top Layer w0.2: U1.20 14.85,21.488 ccw(c16.503,21.488) 16.503,19.835 19.921,19.835 ccw(c19.921,22.825) 22.036,20.711 TP20.1
D1: TP18.1 U1.4 | length 13.9
  Top Layer w0.25: U1.4 11.035,28.45 cw(c11.035,24.591) 13.764,27.32 17.282,23.802 ccw(c18.493,25.012) 18.493,23.3 20.674,23.3 cw(c20.674,21.849) TP18.1
D2: TP26.1 U1.26 | length 2.3
  Top Layer w0.25: U1.26 18.992,24.95 cw(c18.992,23.542) 19.987,24.537 TP26.1
D3: TP27.1 U1.27 | length 3.7
  Top Layer w0.25: U1.27 19.4,25.45 cw(c19.4,23.096) 21.064,24.761 TP27.1
GND: C1.1 C2.1 C3.1 C4.1 C5.1 C6.1 C7.1 C8.1 C9.1 C12.1 C13.1 C14.1 C15.1 C16.1 C17.1 C18.1 C19.1 C20.1 C21.1 C22.1 C23.1 C24.1 C25.1 C26.1 C27.1 D1.1 D2.2 D3.3 J1.2 J3.3 J4.3 J5.4 J6.4 R11.2 R12.2 R13.2 R14.2 R15.2 R17.2 R22.2 R27.2 R28.2 R34.2 TP8.1 TP9.1 TP10.1 TP11.1 TP12.1 TP13.1 TP14.1 U1.8 U1.23 U1.35 U1.44 U1.47 U2.1 U3.1 U3.7 U4.2 U5.2 U6.1 U7.2 U7.8 U7.9 U8.1 U8.2 U9.1 U9.2 U10.5 U11.2 U11.5 | length 62.4
  Top Layer w0.15: U10.5 7.266,35.389 cw(c7.266,35.015) 7.639,35.015 7.639,33.219 cw(c6.481,33.219) C21.1
  Top Layer w0.2: R34.2 13.975,12.999 ccw(c13.675,13.299) 14.099,13.299 14.099,13.605 ccw(c13.627,13.605) 13.961,13.939 13.7,14.2 C27.1
  Top Layer w0.25: v1(7.4,31.815) C21.1@7.4,32.4 ; C13.1 8.4,26.45 U1.8 ; U1.47 11.85,32.232 cw(c12.725,32.232) C9.1 v1(12.691,32.851) ; v1(13.35,30.328) U1.44 ; R34.2@13.5,12.524 C19.1 15.434,11.7 cw(c15.434,11.359) U7.9 ; U7.9@15.275,11.2 ccw(c15.275,11.6) U7.9 ; 15.8,24.3 16.35,23.75 U1.23 16.35,21.775 C6.1 v1(16.5,21.04) ; U7.9@16,11.925 U7.2 16,13.578 cw(c16.597,13.578) C17.1 ; C6.1@16.35,21.746 ccw(c16.521,21.746) C6.1@16.4,21.625 ; U7.8 16.65,10.945 15.995,11.6 U7.9 ; v1(17.9,31.685) C7.1 cw(c17.176,31.1) 17.688,30.588 17.441,30.341 ccw(c17.783,30) 17.3,30 17.3,29.725 ccw(c17.575,29.725) 17.575,29.45 U1.35 ; U3.1 ccw(c18.78,35.219) 19.47,34.53 19.554,34.614 cw(c20.23,33.938) U3.7 20.658,34.894 cw(c20.658,34.297) C18.1 v1(21.08,34.135) ; v1@23.776,23.549 R15.2
  Top Layer w0.3: v1(5.815,20.967) C22.1 ; U9.2 18.825,7.654 cw(c20.02,7.654) C24.1 cw(c18.45,7.775) 19.474,7.775 U9.1 ; 23.876,19.8 v1@23.876,23.549 ; U8.1 25.375,7.15 ccw(c25.375,8.174) C23.1 ccw(c25.254,6.605) 25.254,7.8 U8.2
  Top Layer w0.35: R17.2 11.7,17.452 12.524,17.452 C1.1 ; C1.1@12.533,18.355 v1(12.533,18.94) ; R12.2 15.324,17.452 v1(15.324,17.902) C2.1 ; C17.1 v1(16.175,14.435) ; R13.2@17.124,17.452 C3.1 C4.1 v1(17.924,17.902) 17.924,17.452 R14.2 ; C24.1 v1(19.175,9.034)
  Top Layer w0.4: C22.1 ccw(c6.468,20.967) 6.468,20.9 U11.5 7.5,21.219 cw(c8.131,21.219) 8.131,21.85 U11.2 ; D2.2 v1(6.625,28.593) C12.1 ; C15.1 v1(7.9,26.4) C13.1 ; R28.2@17.25,1.7 U5.2 v1(19.125,1.7) ; v1(19.049,11.775) U4.2 R27.2 ; U9.1 19.474,6.975 ccw(c19.949,6.975) 19.949,6.5 C26.1 ; v1(25.699,5.415) ccw(c25.699,5.815) 26.099,5.815 C23.1
  Top Layer w0.6: v2(15.675,8) D3.3
  other v1: 23.676,23.549 1.1,24.125 1.1,27.875
LED: R18.2 U1.6 | length 1.5
  Top Layer w0.2: R18.2 ccw(c8.568,27.617) R18.2@8.568,27.45
  Top Layer w0.25: R18.2@8.568,27.45 U1.6
MISO: TP22.1 U1.40 U3.5 | length 8.7
  Top Layer w0.25: U1.40 15.35,32.534 cw(c16.595,32.534) 15.715,33.415 TP22.1@16.2,33.9 ; TP22.1 15.9,33.928 17.342,35.37 ccw(c16.712,36) 17.603,36 cw(c18.343,36) 18.343,36.74 19.168,36.74 cw(c19.168,35.496) 20.048,36.376 U3.5
MOSI: TP23.1 U1.41 U3.3 | length 8.9
  Top Layer w0.25: U1.41 14.85,32.758 cw(c15.13,32.758) 14.932,32.956 ccw(c14.677,33.211) 15.038,33.211 15.038,34.018 cw(c15.879,34.018) 15.879,34.858 ccw(c15.879,35.58) 16.6,35.58 TP23.1 ; U3.3 v1(19.38,35.544)
  Mid Layer 2 w0.25: TP23.1 18.356,36 cw(c18.356,34.628) 19.326,35.598 v1(19.38,35.544)
MQ2_EN: J5.2 U1.5 | length 17.3
  Top Layer w0.25: J5.2 ccw(c5.2,25.425) 4,25.425 4,23.8 ccw(c4.548,23.8) 4.548,23.252 5.931,23.252 ccw(c5.931,23.637) 6.204,23.364 ; 6.205,23.365 cw(c6.477,23.092) 6.477,23.478 9.754,23.478 ccw(c9.754,24.849) 10.723,23.878 ccw(c9.754,24.849) 10.724,23.879 11.805,24.96 ; U1.5 11.028,27.95 cw(c11.028,26.771) 12.206,26.771 12.206,25.929 cw(c10.835,25.929) 11.805,24.961
NetC10_1: C10.1 U2.6 | length 1.8
  Top Layer w0.3: U2.6 cw(c9.354,16) 8.927,16.427 9.693,17.193 ccw(c9.433,17.452) C10.1
NetC10_2: C10.2 L1.1 U2.2 | length 6.4
  Top Layer w0.4: L1.1@7.05,17.452 C10.2
  Top Layer w0.5: L1.1 7.05,16.65 ccw(c8.9,16.65) 8.9,14.8 cw(c8.9,14) 9.7,14 U2.2
NetC11_1: C11.1 R21.2 R22.1 U2.4 | length 3.4
  Top Layer w0.35: U2.4 10.705,16 R22.1 C11.1 11.657,18.328 R21.2
NetC11_2: C11.2 R21.1 R23.2 | length 1.9
  Top Layer w0.35: R23.2 R21.1
NetC12_2: C12.2 R26.2 U1.7 | length 4.6
  Top Layer w0.2: C12.2@7.537,27.471 7.537,27.351 7.759,27.129 ccw(c8.191,27.56) 8.191,26.95 U1.7
  Top Layer w0.3: R26.2 6.5,26.984 cw(c7.109,26.984) 7.109,27.593 C12.2@7.414,27.593
  Top Layer w0.4: C12.2@7.414,27.593 cw(c7.414,27.471) C12.2@7.537,27.471
NetC13_2: C13.2 L2.2 U1.9 | length 2.4
  Top Layer w0.25: C13.2 8.772,25.771 cw(c9.203,25.34) 9.203,25.95 U1.9
  Top Layer w0.35: L2.2 C13.2
NetD2_1: D2.1 R18.1 | length 1.1
  Top Layer w0.4: R18.1 D2.1@8.4,29.676
NetJ6_1: J6.1 R9.2 | length 1.2
  Top Layer w0.35: R9.2 24.822,27.634 cw(c24.822,27.382) J6.1
NetJ6_2: J6.2 R10.2 | length 1.2
  Top Layer w0.35: R10.2 24.952,25 ccw(c24.952,25.068) J6.2
NetR5_1: R5.1 TP1.1 | length 1.6
  Top Layer w0.35: R5.1 cw(c12.548,16.461) 12.612,16.525 12.664,16.473 ccw(c13.474,16.473) 12.902,15.9 TP1.1
NetR6_1: R6.1 TP2.1 | length 1
  Top Layer w0.4: TP2.1@15.3,15.552 R6.1
NetR7_1: R7.1 TP3.1 | length 1
  Top Layer w0.4: TP3.1@17.1,15.552 R7.1
NetR8_1: R8.1 TP4.1 | length 1.6
  Top Layer w0.35: R8.1 cw(c17.948,16.461) 18.012,16.525 18.064,16.473 ccw(c18.874,16.473) 18.302,15.9 TP4.1
NetR16_2: R16.2 R17.1 U2.5 | length 3.8
  Top Layer w0.2: U2.5 9.7,15.7 ccw(c10.7,15.7) 10.7,14.7 11.676,14.7 cw(c11.676,14.676) R16.2
  Top Layer w0.4: R16.2 R17.1
NetR19_2: R19.2 U1.42 | length 2
  Top Layer w0.25: R19.2 cw(c14.18,33.404) 14.35,33.404 U1.42
NetR20_2: R20.2 U1.43 | length 2.1
  Top Layer w0.25: R20.2 cw(c12.314,32.438) 13.85,32.438 U1.43
NetR27_1: R27.1 U4.3 | length 1
  Top Layer w0.4: U4.3 R27.1@18.099,13.65
NetR28_1: R28.1 U5.3 | length 1
  Top Layer w0.4: R28.1@17.25,0.75 U5.3
NetR29_2: R29.2 U4.1 U8.4 | length 5.8
  Top Layer w0.4: U4.1 19.999,12.427 ccw(c20.985,12.427) 20.288,11.73 20.796,11.222 cw(c19.826,10.252) 21.198,10.252 R29.2 21.899,8.852 ccw(c22.868,9.822) 22.868,8.45 U8.4
NetR30_1: R30.1 TP30.1 U9.5 | length 1.2
  Top Layer w0.32: U9.5 18.825,5.447 ccw(c20.196,5.447) R30.1@19.226,4.477
NetR30_2: R30.2 U5.1 U9.4 | length 3.3
  Top Layer w0.32: R30.2@17.773,4.477 ccw(c16.803,5.447) 18.175,5.447 U9.4
  Top Layer w0.5: R30.2 17.598,2.95 ccw(c17.898,2.95) 17.898,2.65 U5.1
NetR31_2: R31.2 U8.6 | length 1.1
  Top Layer w0.4: R31.2 U8.6
NetR32_2: R32.2 U9.6 | length 0.9
  Top Layer w0.4: U9.6 R32.2
PIR: J4.1 U1.25 | length 23.8
  Top Layer w0.25: v1(17.325,24.45) U1.25
  Mid Layer 2 w0.2: v1(17.325,24.45) 14.998,24.45 ccw(c14.998,23.252) 13.8,23.252 13.8,17.71 ccw(c14.41,17.71) 14.41,17.1 19.217,17.1 cw(c19.217,15.355) 20.451,16.589 20.768,16.272 ccw(c21.202,16.706) 21.202,16.092 21.808,16.092 cw(c21.808,15.5) 22.4,15.5 22.4,13.85 cw(c21.3,13.85) J4.1
PPM: R10.1 R15.1 U1.28 | length 5.5
  Top Layer w0.2: U1.28 19.398,25.95 cw(c19.398,23.41) 21.194,25.206 ccw(c21.691,25.703) 21.691,25 R10.1
  Top Layer w0.3: R15.1 R10.1
RX: R20.1 TP7.1 | length 1
  Top Layer w0.35: TP7.1@13.032,35.364 cw(c12.145,34.476) R20.1
SCK: TP21.1 U1.39 U3.4 | length 6
  Top Layer w0.25: U1.39 15.85,32.25 cw(c16.646,32.25) 16.19,32.902 TP21.1@17.293,33.823 ; TP21.1 17.3,34.032 cw(c18.672,34.032) 17.702,35.002 17.888,35.188 ccw(c17.376,35.7) 18.1,35.7 18.1,35.847 cw(c18.448,35.847) 18.448,36.194 U3.4
SCL: R24.1 TP31.1 U1.45 U10.3 U11.1 | length 28.2
  Top Layer w0.25: v1(12.85,29.744) U1.45
  Top Layer w0.3: v1(8.515,20.9) U11.1
  Top Layer w0.4: v1(8.216,36.389) U10.3 ; TP31.1 R24.1@10.176,32.257
  Mid Layer 2 w0.2: v1(8.515,20.9) 7.083,22.333 cw(c8.853,24.103) 6.349,24.103 6.349,26.701 cw(c8.062,26.701) 6.851,27.912 7.022,28.084 ccw(c6.696,28.41) 7.158,28.41 7.158,29.838 cw(c9.07,29.838) 9.125,31.75 cw(c9.125,30.264) TP31.1
  Bottom Layer w0.15: v1(8.216,36.389) ccw(c8.831,35.774) 7.961,35.774 7.961,33.06 ccw(c8.738,33.06) 8.738,32.283 cw(c8.738,31.151) 9.539,31.952 TP31.1 ; TP31.1@10.59,31.131 cw(c10.59,29.023) 12.08,30.514 v1(12.85,29.744)
SDA: R25.1 TP32.1 U1.46 U10.4 U11.3 | length 35.8
  Top Layer w0.2: 4.001,22.999 cw(c4.972,23.968) 3.6,23.968 3.6,27.905 cw(c4.795,27.905) 3.95,28.75 5.366,30.166 ccw(c4.218,31.315) TP32.1 ; 4.002,22.998 4.911,22.089 ; 4.912,22.088 cw(c3.941,21.119) 5.312,21.119 5.312,20.7 ccw(c5.812,20.7) 5.812,20.2 10.4,20.2 ccw(c10.4,20.738) 10.938,20.738 10.938,22.5 ccw(c10.638,22.5) 10.638,22.8 U11.3 ; R25.1 7.324,30.939 ccw(c7.763,30.939) 7.763,30.5 10.859,30.5 cw(c10.859,30.06) 11.17,30.371 ccw(c11.521,30.721) 11.521,30.226 11.935,30.226 ccw(c11.935,30.641) 12.35,30.641 U1.46
  Top Layer w0.25: TP32.1 6.026,31.131 R25.1
  Top Layer w0.4: U10.4 v1(7.385,36.389)
  Bottom Layer w0.15: TP32.1 ccw(c5.842,32.007) 6.331,31.517 7.265,32.451 ccw(c6.362,33.355) 7.639,33.355 7.639,35.774 ccw(c6.769,35.774) v1(7.385,36.389)
SEN0: U1.3 U4.4 | length 26.1
  Top Layer w0.25: U1.3 v1(10.875,28.95)
  Top Layer w0.4: v1(17.224,9.75) U4.4@18.099,9.75
  Mid Layer 2 w0.2: 10.578,28.653 ccw(c11.01,28.222) 10.4,28.222 10.4,15.08 ccw(c12.568,15.08) 11.035,13.547 11.943,12.639 ccw(c13.746,14.442) 13.746,11.892 15.842,11.892 cw(c15.842,10.52) 16.811,11.491 ; 10.579,28.654 v1(10.875,28.95) ; 16.812,11.49 17.018,11.284 cw(c16.52,10.786) 17.224,10.786 v1(17.224,9.75)
SEN1: U1.2 U5.4 | length 39.1
  Top Layer w0.25: U1.2 v1(11.375,29.45)
  Top Layer w0.4: v1(19.975,1.7) 19.975,1.151 ccw(c20.376,1.151) 20.376,0.75 U5.4
  Mid Layer 2 w0.2: 10.178,28.946 ccw(c10.61,28.515) 10,28.515 10,15.004 ccw(c12.542,15.004) 10.744,13.206 11.611,12.34 ccw(c13.662,14.391) 13.662,11.49 15.805,11.49 cw(c15.805,10.755) 16.325,11.275 16.513,11.087 cw(c16.06,10.635) 16.7,10.635 16.7,9.659 ccw(c17.159,9.659) 17.159,9.2 17.25,9.2 ccw(c17.25,9.804) 17.677,9.377 17.721,9.421 cw(c18.153,8.99) 18.153,9.6 18.262,9.6 cw(c18.262,9.187) 18.675,9.187 18.675,3.569 ccw(c20.046,3.569) 19.075,2.6 ; 10.179,28.947 10.503,29.271 cw(c10.935,28.84) 10.505,29.273 cw(c10.935,28.84) 10.935,29.45 v1(11.375,29.45) ; 19.076,2.599 v1(19.975,1.7)
SNS_I0: C25.2 R31.1 U1.14 | length 27.2
  Top Layer w0.25: U1.14 v1(11.85,23.975)
  Top Layer w0.35: R31.1 v1(24.102,6.635)
  Top Layer w0.4: R31.1 C25.2
  Mid Layer 2 w0.2: v1@11.909,23.975 11.909,14.818 ccw(c12.518,14.818) 12.087,14.388 ; 12.087,14.387 12.475,13.999 ; 12.476,13.999 ccw(c12.906,14.43) 12.906,13.821 12.927,13.821 cw(c12.927,13.211) 13.358,13.642 13.839,13.161 ccw(c14.988,14.31) 14.988,12.685 16.174,12.685 cw(c16.174,11.313) 17.143,12.284 ; 17.144,12.283 22.39,7.037 ; 22.391,7.036 ccw(c23.36,8.006) 23.36,6.635 v1(24.102,6.635)
SNS_I1: C26.2 R32.1 U1.13 | length 23.8
  Top Layer w0.2: U1.13 11.35,21.916 ccw(c11.691,21.916) v1(11.45,21.675)
  Top Layer w0.35: R32.1 ccw(c21.376,5.574) 21.4,5.574 C26.2 v1(21.935,6.5)
  Mid Layer 2 w0.2: v1(11.45,21.675) 11.386,21.611 11.386,14.948 ccw(c12.543,14.948) 11.725,14.13 12.294,13.561 ccw(c12.724,13.99) 12.724,13.383 cw(c12.724,12.879) 12.779,13.38 cw(c12.724,12.879) 13.08,13.235 13.349,12.966 ccw(c14.957,14.573) 14.957,12.3 16.039,12.3 cw(c16.039,10.928) 17.008,11.899 ; 17.009,11.898 21.601,7.305 ; 21.602,7.305 cw(c20.796,6.5) v1(21.935,6.5)
SNS_MQ2: J5.3 U1.12 | length 5.1
  Top Layer w0.25: J5.3@5.511,25.375 6.11,24.776 cw(c5.634,24.3) 6.307,24.3 ccw(c6.586,24.3) 6.586,24.021 8.436,24.021 ccw(c8.436,24.753) 8.954,24.235 9.169,24.45 U1.12
SNS_SRV: C5.2 R9.1 U1.11 | length 17.4
  Top Layer w0.25: U1.11 10.833,24.95 ccw(c10.833,25.661) 11.544,25.661 v1(11.544,26.45) ; v1(19.825,28.45) 19.882,28.45 ccw(c19.882,29.822) 20.852,28.852 21.017,29.017 cw(c21.7,28.334) 21.7,29.3 22.228,29.3 cw(c22.228,28.728) 22.8,28.728 C5.2 22.8,27.658 ccw(c22.824,27.658) R9.1
  Mid Layer 2 w0.25: v1(11.544,26.45) 13.745,28.651 cw(c15.852,26.544) 15.852,29.524 16.844,29.524 cw(c16.844,28.248) 17.747,29.15 18.032,28.865 ccw(c19.034,29.867) 19.034,28.45 v1(19.825,28.45)
SNS_Vin: C27.2 R33.2 R34.1 U1.10 | length 17.2
  Top Layer w0.25: U1.10 v1(10.875,25.45)
  Top Layer w0.4: R33.2 v1(12.6,12.876) 12.6,13.476 ; C27.2 12.6,13.476 ; R34.1 12.6,13.476
  Mid Layer 2 w0.2: v1(10.875,25.45) 10.875,14.945 ccw(c12.395,14.945) 11.32,13.87 12.136,13.055 ; 12.136,13.054 ccw(c12.567,13.486) 12.567,12.876 v1(12.6,12.876)
SPI_CS0: TP17.1 U1.31 | length 3.5
  Top Layer w0.2: U1.31 19.723,27.45 ccw(c19.723,29.99) 21.519,28.194 TP17.1
SPWR: J6.3 R29.1 U8.5 | length 3
  Top Layer w0.4: R29.1 cw(c21.566,7.279) 21.566,7.8 U8.5
  Top Layer w0.5: v2(20.163,7.647) R29.1
SWCLK: J3.1 U1.37 | length 4.6
  Top Layer w0.2: U1.37 16.85,32.2 18.755,32.2 cw(c18.755,31.464) 19.276,31.984 J3.1
SWDIO: J3.2 U1.34 | length 5.1
  Top Layer w0.25: U1.34 19.236,28.95 ccw(c19.236,30.322) 20.205,29.352 21.452,30.598 cw(c22.422,29.628) 22.422,31 J3.2
TRBS0: R1.1 TP15.1 U1.29 | length 4.6
  Top Layer w0.2: U1.29 20.312,26.45 cw(c20.312,24.487) TP15.1
  Top Layer w0.3: TP15.1 R1.1@22.824,25.875
TRBS1: R2.1 TP16.1 U1.30 | length 4.5
  Top Layer w0.2: U1.30 21.278,26.95 ccw(c21.278,27.547) TP16.1
  Top Layer w0.35: TP16.1 ccw(c22.591,28.016) 22.591,26.756 R2.1
TRBS2: R3.1 TP24.1 U1.21 | length 11.8
  Top Layer w0.2: U1.21 15.35,21.35 ccw(c16.5,21.35) 16.5,20.2 19.233,20.2 ccw(c19.233,22.716) 21.012,20.937 TP24.1
  Top Layer w0.3: R3.1 20.165,22.7 cw(c20.165,21.588) 20.951,22.374 TP24.1@21.675,21.65
TRBS3: R4.1 TP25.1 U1.22 | length 7.3
  Top Layer w0.2: U1.22 15.85,21.209 ccw(c16.494,21.209) 16.494,20.565 18.412,20.565 ccw(c18.412,21.429) 19.276,21.429 R4.1
  Top Layer w0.4: R4.1 TP25.1
TX: R19.1 TP6.1 | length 1.3
  Top Layer w0.35: R19.1 TP6.1@14.3,35.8
pads on no net: J4.4 J5.5 LOGO1. U10.1 U10.6

## Polygon pours and split planes (outlines as drawn)
3V3 on Mid Layer 2 "NONET_L02_P-001" (solid, remove dead copper, pour order 4): -1.9,41.2 -1.9,-2 28.4,-2 28.4,41.2
5V on Mid Layer 2 "NONET_L02_P-001" (solid, remove dead copper, pour order 3): 14.7,34.4 12.734,34.4 ccw(c12.734,33.417) 12.04,34.112 10.068,32.141 cw(c9.125,33.085) 9.125,31.75 9.07,31.75 ccw(c9.07,29.838) 7.158,29.838 7.158,28.258 6.349,27.449 6.349,23.066 5.624,22.341 ccw(c6.165,21.8) 5.4,21.8 5.4,20.332 ccw(c6.01,20.332) 6.01,19.722 8.285,19.722 cw(c8.285,19.3) 8.707,19.3 8.707,19.007 cw(c8.3,19.007) 8.3,18.6 5.553,18.6 ccw(c5.552,17.991) 5.121,18.421 3.502,16.802 ccw(c4.471,15.832) 3.1,15.832 3.1,9.368 ccw(c4.472,9.368) 3.502,8.398 6.098,5.802 ccw(c7.068,6.772) 7.068,5.4 18.4,5.4 18.4,8.2 14.8,11.8 14.8,14.5 cw(c15.2,14.5) 15.2,14.9 19.2,14.9 19.5,14.6 22.4,14.6 22.4,10.472 ccw(c23.772,10.472) 23.772,9.1 24.925,9.1 cw(c24.925,8.45) 25.575,8.45 25.575,-1.1 -1.6,-1.1 -1.6,39.3 16,39.3 16,35.7 cw(c14.7,35.7)
GND on Bottom Layer "NONET_L02_P-001" (solid, remove dead copper, pour order 2): -7.3,-5.2 32.8,-5.2 32.8,43.9 -7.3,43.9
GND on Top Layer "NONET_L02_P-001" (solid, remove dead copper, pour order 0): -2.1,38.6 28.1,38.6 28.1,-1.2 -2.1,-1.2
GND on Mid Layer 1 (split plane): 4.49,34.358 4.49,34.349 4.498,34.174 4.522,33.991 4.562,33.811 4.617,33.636 4.688,33.466 4.773,33.303 4.872,33.147 4.984,33.001 5.108,32.866 5.244,32.741 5.39,32.629 5.545,32.53 5.708,32.445 5.878,32.375 6.054,32.319 6.234,32.28 6.416,32.256 6.533,32.251 6.533,32.244 9.119,32.244 9.119,32.253 9.184,32.256 9.366,32.28 9.546,32.32 9.722,32.375 9.892,32.445 10.055,32.53 10.21,32.629 10.356,32.741 10.492,32.866 10.616,33.001 10.728,33.147 10.827,33.303 10.912,33.466 10.983,33.636 11.038,33.812 11.078,33.991 11.102,34.174 11.11,34.349 11.11,34.358 11.11,36.49 24,36.49 24,34.5 25.99,34.5 25.99,23.651 24.433,23.651 24.394,23.646 24.358,23.631 24.326,23.607 22.893,22.174 22.869,22.142 22.854,22.106 22.849,22.067 22.849,9.414 22.849,9.409 22.84,9.295 22.812,9.178 22.767,9.067 22.704,8.965 22.626,8.874 22.535,8.796 22.433,8.733 22.322,8.688 22.205,8.66 22.091,8.651 22.086,8.651 20,8.651 20,8.652 19.876,8.644 19.754,8.62 19.636,8.58 19.524,8.524 19.42,8.455 19.327,8.373 19.245,8.28 19.176,8.176 19.12,8.064 19.08,7.946 19.056,7.824 19.048,7.7 19.049,7.7 19.049,6.414 19.048,6.414 19.057,6.275 19.084,6.138 19.129,6.006 19.191,5.881 19.268,5.765 19.36,5.66 19.465,5.568 19.581,5.491 19.706,5.429 19.838,5.384 19.975,5.357 20.114,5.348 20.114,5.349 23.637,5.349 23.637,5.348 23.806,5.356 23.974,5.381 24.138,5.422 24.298,5.479 24.451,5.552 24.597,5.639 24.733,5.74 24.858,5.854 24.972,5.98 25.073,6.116 25.16,6.261 25.233,6.415 25.29,6.574 25.331,6.739 25.356,6.907 25.365,7.076 25.364,7.076 25.364,9.112 25.363,9.114 25.37,9.196 25.39,9.278 25.422,9.356 25.466,9.428 25.521,9.492 25.585,9.547 25.656,9.591 25.734,9.623 25.816,9.643 25.898,9.649 25.9,9.649 25.99,9.649 25.99,2.6 24,2.6 24,0.51 2.5,0.51 2.5,2.5 0.51,2.5 0.51,34.5 2.5,34.5 2.5,36.49 4.49,36.49
SPWR on Mid Layer 1 (split plane): 25.99,9.951 25.9,9.951 25.9,9.952 25.79,9.945 25.683,9.923 25.579,9.888 25.48,9.839 25.389,9.778 25.306,9.706 25.234,9.623 25.173,9.532 25.125,9.434 25.089,9.33 25.068,9.222 25.061,9.112 25.061,7.076 25.062,7.071 25.053,6.916 25.026,6.759 24.982,6.605 24.921,6.457 24.844,6.317 24.751,6.187 24.645,6.068 24.525,5.961 24.395,5.869 24.255,5.791 24.107,5.73 23.954,5.686 23.796,5.659 23.642,5.651 23.637,5.651 20.114,5.651 20.109,5.651 19.995,5.66 19.878,5.688 19.767,5.733 19.665,5.796 19.574,5.874 19.496,5.965 19.433,6.067 19.388,6.178 19.36,6.295 19.351,6.409 19.351,6.414 19.351,7.7 19.351,7.704 19.359,7.802 19.382,7.901 19.421,7.995 19.475,8.082 19.541,8.159 19.618,8.225 19.705,8.279 19.799,8.318 19.898,8.341 19.996,8.349 20,8.349 22.086,8.349 22.086,8.348 22.225,8.357 22.362,8.384 22.494,8.429 22.619,8.491 22.735,8.568 22.84,8.66 22.932,8.765 23.009,8.881 23.071,9.006 23.116,9.138 23.143,9.275 23.152,9.414 23.151,9.414 23.151,22.004 24.496,23.349 25.99,23.349

## Keep-outs
Keep-Out Layer:
  the board outline again, w0

## Other copper
Top Layer:
  rectangle net GND: 22.944,19.39 25.444,20.49
  rectangle net 5V: 0.9,9.3 2.45,10.2
  rectangle net NetR30_1: 19.1,3.525 21.2,4.875
  pour cut-out: 0.915,20.304 7.499,20.304 7.499,13.1 0.915,13.1
Mid Layer 1 (plane layer: these items are gaps in the copper):
  rectangle: 6.533,32.244 9.119,37
  region: -0.1,2.5 -0.1,0 2.5,0 2.5,2.5
  region: 2.5,37.1 0,37.1 0,34.5 2.5,34.5
  region: 26.6,34.5 26.6,37 24,37 24,34.5
  rectangle: 24,0 26.5,2.6
  lines w0.3: 26.8,9.8 25.9,9.8 ccw(c25.9,9.112) 25.212,9.112 25.212,7.076 cw(c23.637,7.076) 23.637,5.5 20.114,5.5 cw(c20.114,6.414) 19.2,6.414 19.2,7.7 cw(c20,7.7) 20,8.5 22.086,8.5 ccw(c22.086,9.414) 23,9.414 23,22.067 24.433,23.5 27,23.5
Multi-Layer:
  pour cut-out: 6.096,37.033 6.096,32.534 9.363,32.534 9.363,37.033

## Silkscreen, mask and mechanical layers (free items; w line width, h text height)
Bottom Overlay:
  lines w0.3: 20.175,25.875 20.95,25.875 ; 20.175,27.125 20.95,27.125 ; 20.4,20.1 20.4,20.875 ; 21.7,20.1 21.7,20.875
  text "R" at 13.25,34.85 h0.8 r90
  text "T" at 14.5,34.85 h0.8 r90
  text "C" at 20.927,31.95 h0.8
  text "D" at 22.167,31.95 h0.8
  text "I2C" at 8.969,30.661 h0.8
  text "D" at 6.109,29.664 h0.8
  text "C" at 10.442,29.664 h0.8
  text "AI" at 23.95,28.093 h0.8 r90
  text "+" at 3.483,27.475 h0.8
  text "EN" at 3.883,26.225 h0.8
  text "S" at 23.95,25.287 h0.8 r90
  text "AI" at 3.75,25.05 h0.8
  text "+" at 24.083,22.747 h0.8 r90
  text "SH Node 2k23 v1.0.1" at 4.34,15.5 h0.8 r90
  text "+" at 22.417,14.267 h0.8 r270
  text "PIR" at 24.75,11.85 h0.8
  text "3V3" at 3.45,7.3 h0.8
  text "+" at 21.167,5.117 h0.8
  text "GND" at 7.696,4.594 h0.8
  text "24" at 9.836,4.594 h0.8
  text "L" at 12.697,4.594 h0.8
  text "H" at 15.237,4.594 h0.8

## Dimensions
0,0 to 0,37 on Mechanical 1
0,0 to 26.5,0 on Mechanical 1